# Altium PCB Placa teste.PcbDoc
Units mil, origin at the board's own origin, x right, y up, seen from the top; angles counter-clockwise.
Board outline 6000 x 4000 mil, 2 copper layers (Top Layer, Bottom Layer); 20 components, 10 nets, 43 pads, 0 vias.
Unrouted connection lines stored in the file: 32.
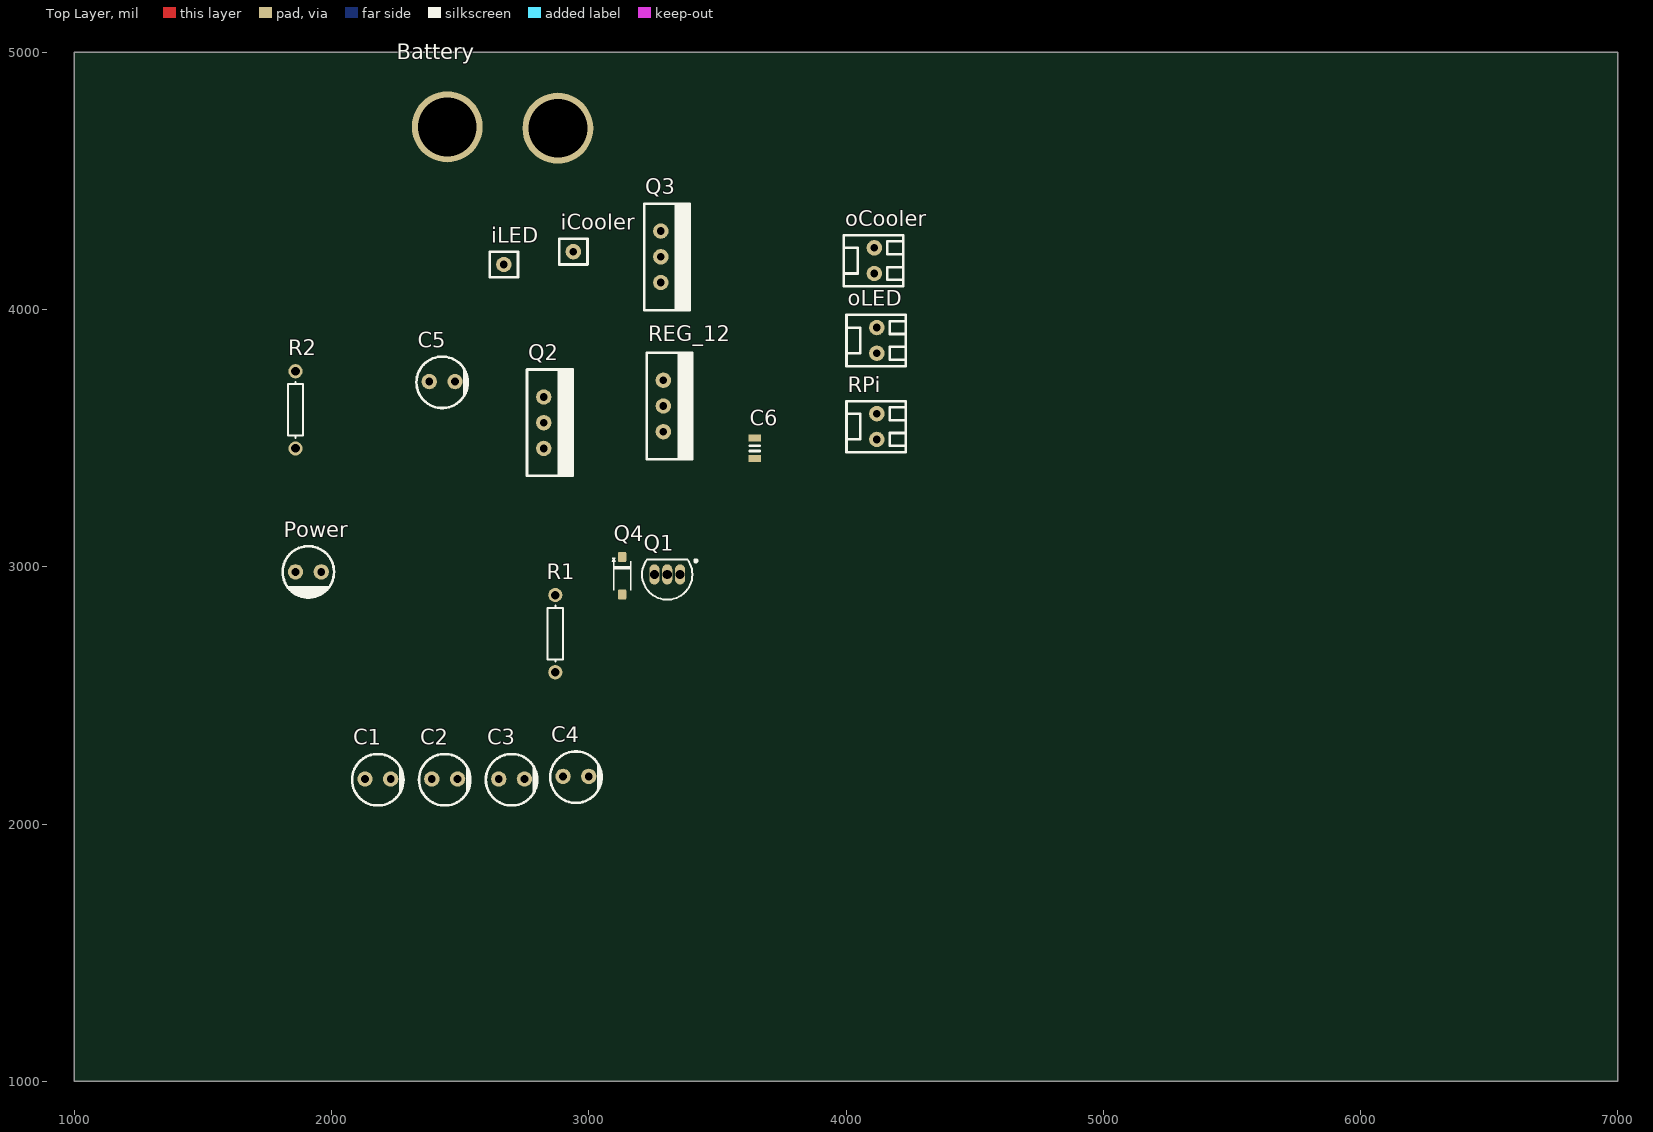
[diagram p0: Top Layer view]
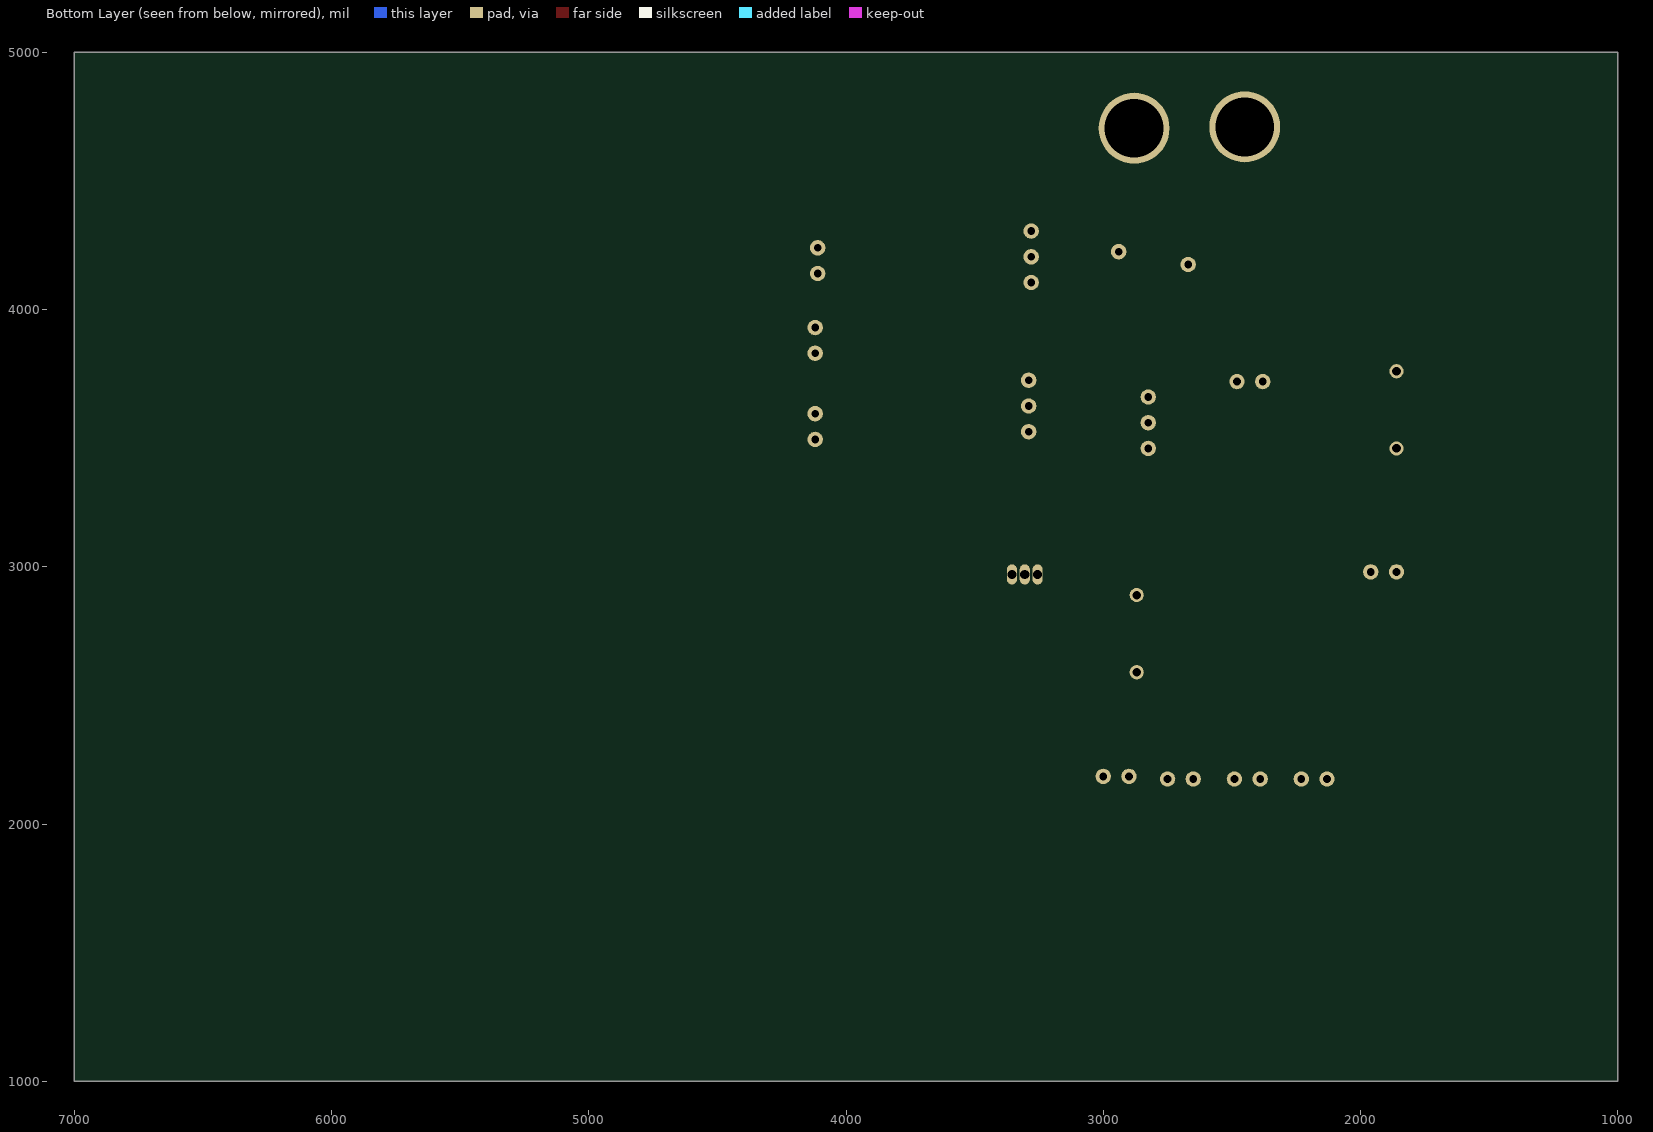
[diagram p1: Bottom Layer view, seen from below]

## Layer stack, top to bottom
Top Solder: solder mask 0.4, Solder Resist, Dk 3.5
Top Layer: signal copper 1.4
Dielectric 1: dielectric 12.6, FR-4, Dk 4.8
Bottom Layer: signal copper 1.4
Bottom Solder: solder mask 0.4, Solder Resist, Dk 3.5

## Board outline
1000,1000 7000,1000 7000,5000 1000,5000

## Design rules (kind name [scope] priority, off if disabled: settings)
Clearance [All] p1: gap=10 ignorepadtopadclearanceinfootprint=FALSE except(0: Arc-Hole Track-Hole SMDPad-Hole THPad-Hole Via-Hole Fill-Hole Poly-Hole Region-Hole Text-Hole)
PolygonConnect [All] p1: connectstyle=Relief reliefconductorwidth=10 reliefentries=4 polygonreliefangle="90 Angle" airgapwidth=10
RoutingVias [All] p1: holewidth=28 width=50 viastyle="Through Hole" minholewidth=28 minwidth=50 maxholewidth=28 maxwidth=50
SolderMaskExpansion [All] p1: expansion=4
Width [All] p1: maxlimit=10 minlimit=10 preferedwidth=10
30 further rules are at their usual default settings.

## Components (designator, comment, footprint, x,y, rotation, side; value= is the part's Value field where it differs from the comment)
Battery "*" XT90 2450,4710 r0 top
C1 "*" "Eletrolytic Capacitor 5x5mm" 2130,2175 r0 top
C2 "*" "Eletrolytic Capacitor 5x5mm" 2390,2175 r0 top
C3 "*" "Eletrolytic Capacitor 5x5mm" 2650,2175 r0 top
C4 "*" "Eletrolytic Capacitor 5x5mm" 2900,2185 r0 top
C5 "*" "Eletrolytic Capacitor 5x5mm" 2380,3720 r0 top
C6 "*" "SMD Capacitor" 3645,3500 r0 top
iCooler "*" "HEADER 1X1 8.5MM" 2940,4225 r90 top
iLED "*" "HEADER 1X1 8.5MM" 2670,4175 r90 top
oCooler "*" KK2 4110,4140 r90 top
oLED "*" KK2 4120,3830 r90 top
Power "LED 5mm THT" "LED THT" 1860,2980 r0 top
Q1 "TIP121" TO-92A 3305,2970 r90 top
Q2 "Mosfet N" TO-220 2825,3460 r90 top
Q3 "Mosfet N" TO-220 3280,4105 r90 top
Q4 "BZT52HC10WF-7" SOD123 3130,2965 r270 top
R1 "Resistor THT" "RESISTOR THT 5mm" 2870,2740 r90 top value=?
R2 "Resistor THT" "RESISTOR THT 5mm" 1860,3610 r270 top value=330
REG_12 "78XX TO-220" TO-220 3290,3525 r90 top
RPi "*" KK2 4120,3495 r90 top

## Footprints (in the part's own frame and the unit in brackets; to place one, negate y for a bottom-side part, rotate by r counter-clockwise, add the part's x,y. Pads: shape width x height; smd on the part's side, far side on the other; paste and mask are expansions set on the pad)
"Eletrolytic Capacitor 5x5mm" [mil]
  round 60 hole 30: 1(0,0) 2(100,0)
  silkscreen extent -50,-103 150,97, body extent -50,-99 150,101, height 520
"HEADER 1X1 8.5MM" [mil] "Stackable 1 pin header"
  round 60 hole 30: 1(0,0)
  silkscreen extent -50,-55 50,55, body extent -50,-57 50,57, height 335
KK2 [mil] "KK Conector, 2 ways"
  round 60 hole 30: 1(0,0) 2(100,0)
  silkscreen extent -50,-112 149,118, body extent -50,-116 150,114, height 468
"LED THT" [mil]
  round 60 hole 30: 1(0,0) 2(100,0)
  silkscreen extent -50,-100 150,100, body extent -28,-59 129,79, height 212
"RESISTOR THT 5mm" [mm]
  round 1.4 hole 0.85: 1(-3.81,0) 2(3.81,0)
  silkscreen extent -2.77,-0.76 2.77,0.76, body extent -4.07,-1 4.07,1.1, height 2.55
"SMD Capacitor" [mm]
  rect 1.25x0.7 smd: 1(0,0) 2(0,-2)
  silkscreen extent -0.51,-1.27 0.51,-0.76, body extent -0.63,-1.99 0.62,0.01, height 1
SOD123 [mm] "SOD-123; 2 Leads; Body 2.7 x 1.6 mm, (LxW)"
  round 0.508 on Mech15: 0(0,0)
  rrect25% 1x0.8 smd: A(1.85,0) K(-1.85,0)
  silkscreen extent -1.75,-1 1.45,0.85, body extent -1.95,-0.9 1.95,0.9, height 1.18
TO-92A [mm] "TO, Flat Index; 3 In-Line, Axial Leads; Body Dia. 4.5mm; Leads 0.51 x 0.48 mm (max)"
  oval 2x1 hole 0.9: 1(0,-1.27) 2(0,0) 3(0,1.27)
  silkscreen extent -2.48,-2.96 1.5,2.48, body extent -2.48,-2.5 1.5,2.5, height 6.86
TO-220 [mil] "TO-220 coupling"
  round 60 hole 30: 1(0,0) 2(100,0) 3(200,0)
  silkscreen extent -107,-112 307,65, body extent -107,-112 307,65, height 810
XT90 [mm]
  round 7 hole 5.8 mask+0.102: 1(0,0)
  round 7 hole 5.8: 2(10.922,-0.127)
  body extent -5.24,-5.63 16.16,5.37, height 20.7

## Part data
Battery: library part XT90
C1 C2 C3 C4 C5: library part "Electrolytic Capacitor 0.33uF"
C6: library part "Capacitor SMD 0805"
iCooler iLED: library part "Male Pin Head 1x1"
oCooler oLED RPi: library part KK2, "KK Connector, 2 ways"
Q1: library part 2N3906, "PNP General Purpose Amplifier", ComponentLink1Description="Manufacturer Link", ComponentLink1URL=http://www.fairchildsemi.com/, ComponentLink2Description=Datasheet, ComponentLink2URL=http://www.fairchildsemi.com/ds/2N%2F2N3906.pdf, DatasheetVersion=1997, LatestRevisionDate=15-Jan-2003, LatestRevisionNote="PCB Footprint 'BCY-W3/D4.7' replaced", PackageDescription="TO, Flat Index; 3 In-Line, Axial Leads; Body Dia. 4.5mm; Leads 0.51 x 0.48 mm (max)", PackageReference=TO-92A, PackageVersion=Sep-1998, Published=8-Jun-2000, Publisher="Altium Limited"
Q4: "Diode Zener 10.6V 375 mW AEC-Q101"
Q2 Q3: Model=IRF3205

## Nets (pads, with @x,y where several pads share a name; then routed paths per layer and width w, separated by ;. In a path a pad name is that pad's centre, name@x,y a point inside that pad or via, vN(x,y) a via of type N, cw(c..) or ccw(c..) an arc to the next point about the centre after c; other vN are vias at no path point)
5V: C2.1 C3.1 C4.1 Q1.3 R2.1 RPi.2
C_Cooler: iCooler.1 Q3.2
C_LED: iLED.1 Q2.2
C_out: oCooler.1 Q3.3
GND: Battery.2 C1.2 C2.2 C3.2 C4.2 C5.2 C6.1 oLED.1 Power.2 Q2.1 Q3.1 Q4.A RPi.1
LED: C6.2 oLED.2 REG_12.3
NetPower_1: Power.1 R2.2
NetQ1_2: Q1.2 Q4.K R1.2
NetQ2_3: Q2.3 REG_12.2
VCC: Battery.1 C1.1 C5.1 oCooler.2 Q1.1 R1.1 REG_12.1
pads on no net: Q4.0